# Altium PCB PCB13.PcbDoc
Units mil, origin at the board's own origin, x right, y up, seen from the top; angles counter-clockwise.
Board outline 6000 x 4000 mil, 2 copper layers (Top Layer, Bottom Layer); 12 components, 19 nets, 82 pads, 0 vias.
Unrouted connection lines stored in the file: 1.
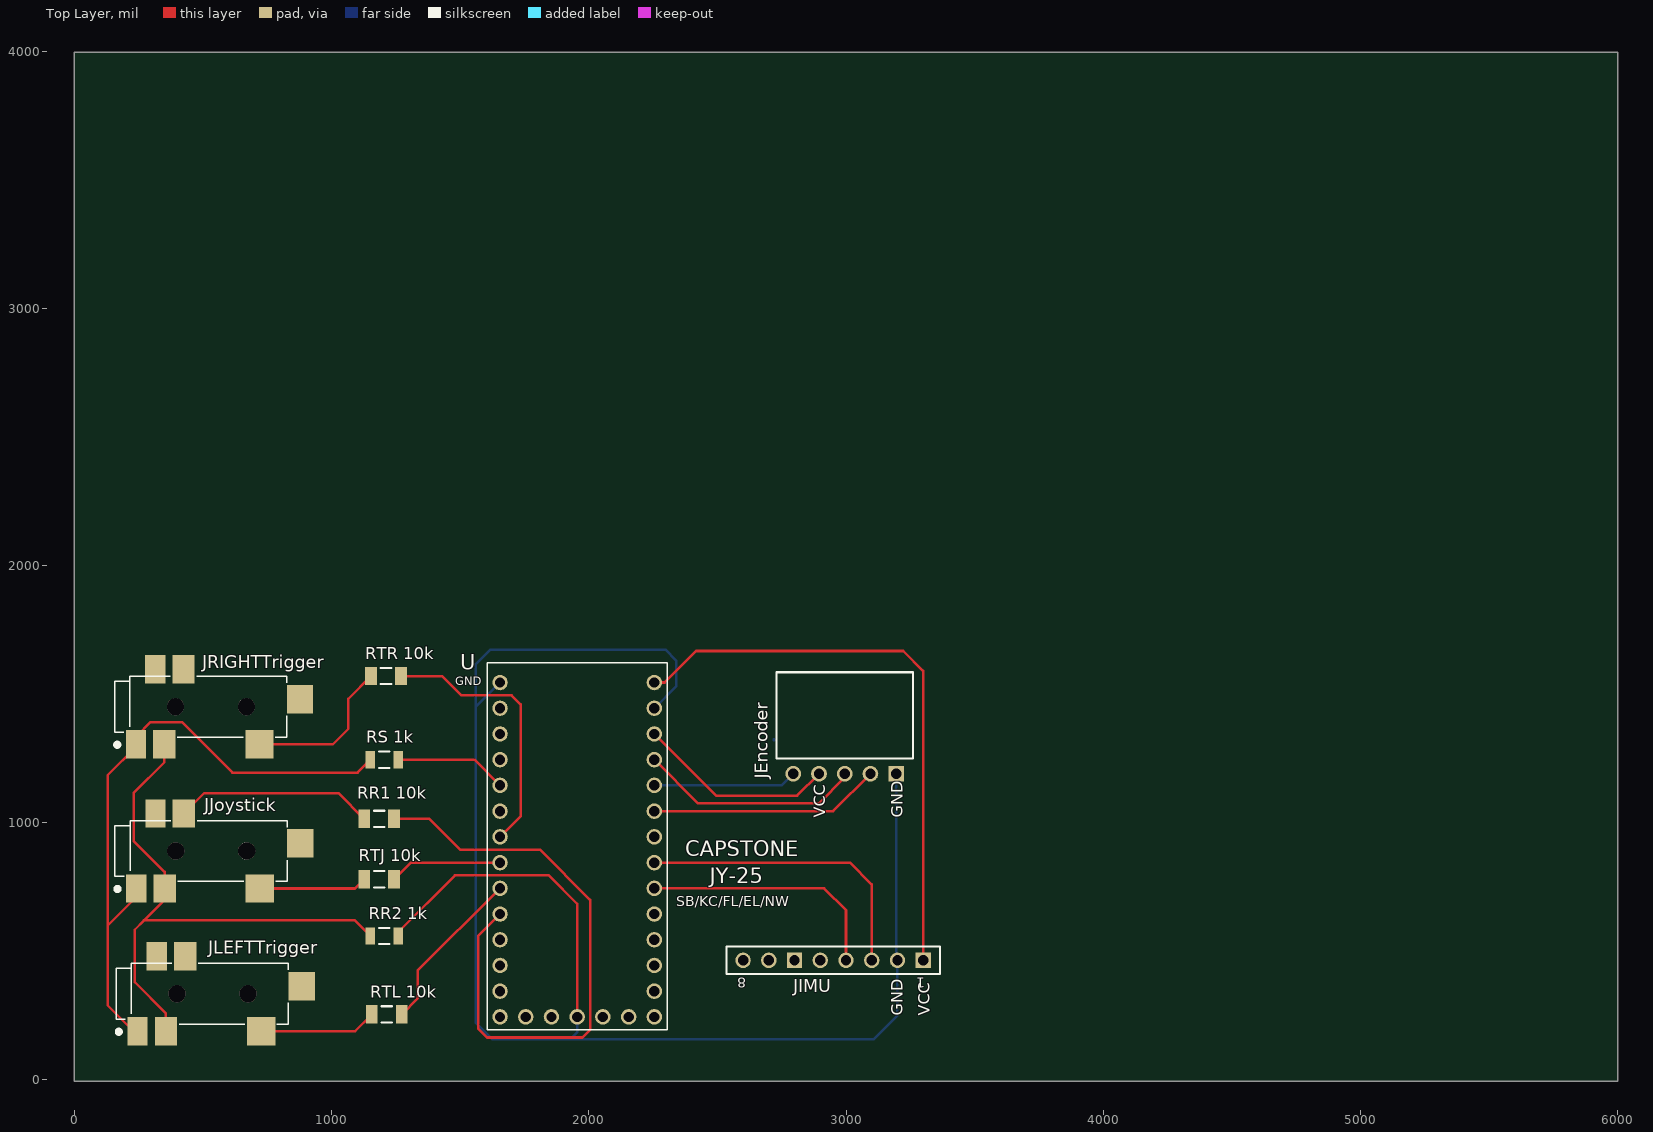
[diagram p0: Top Layer view]
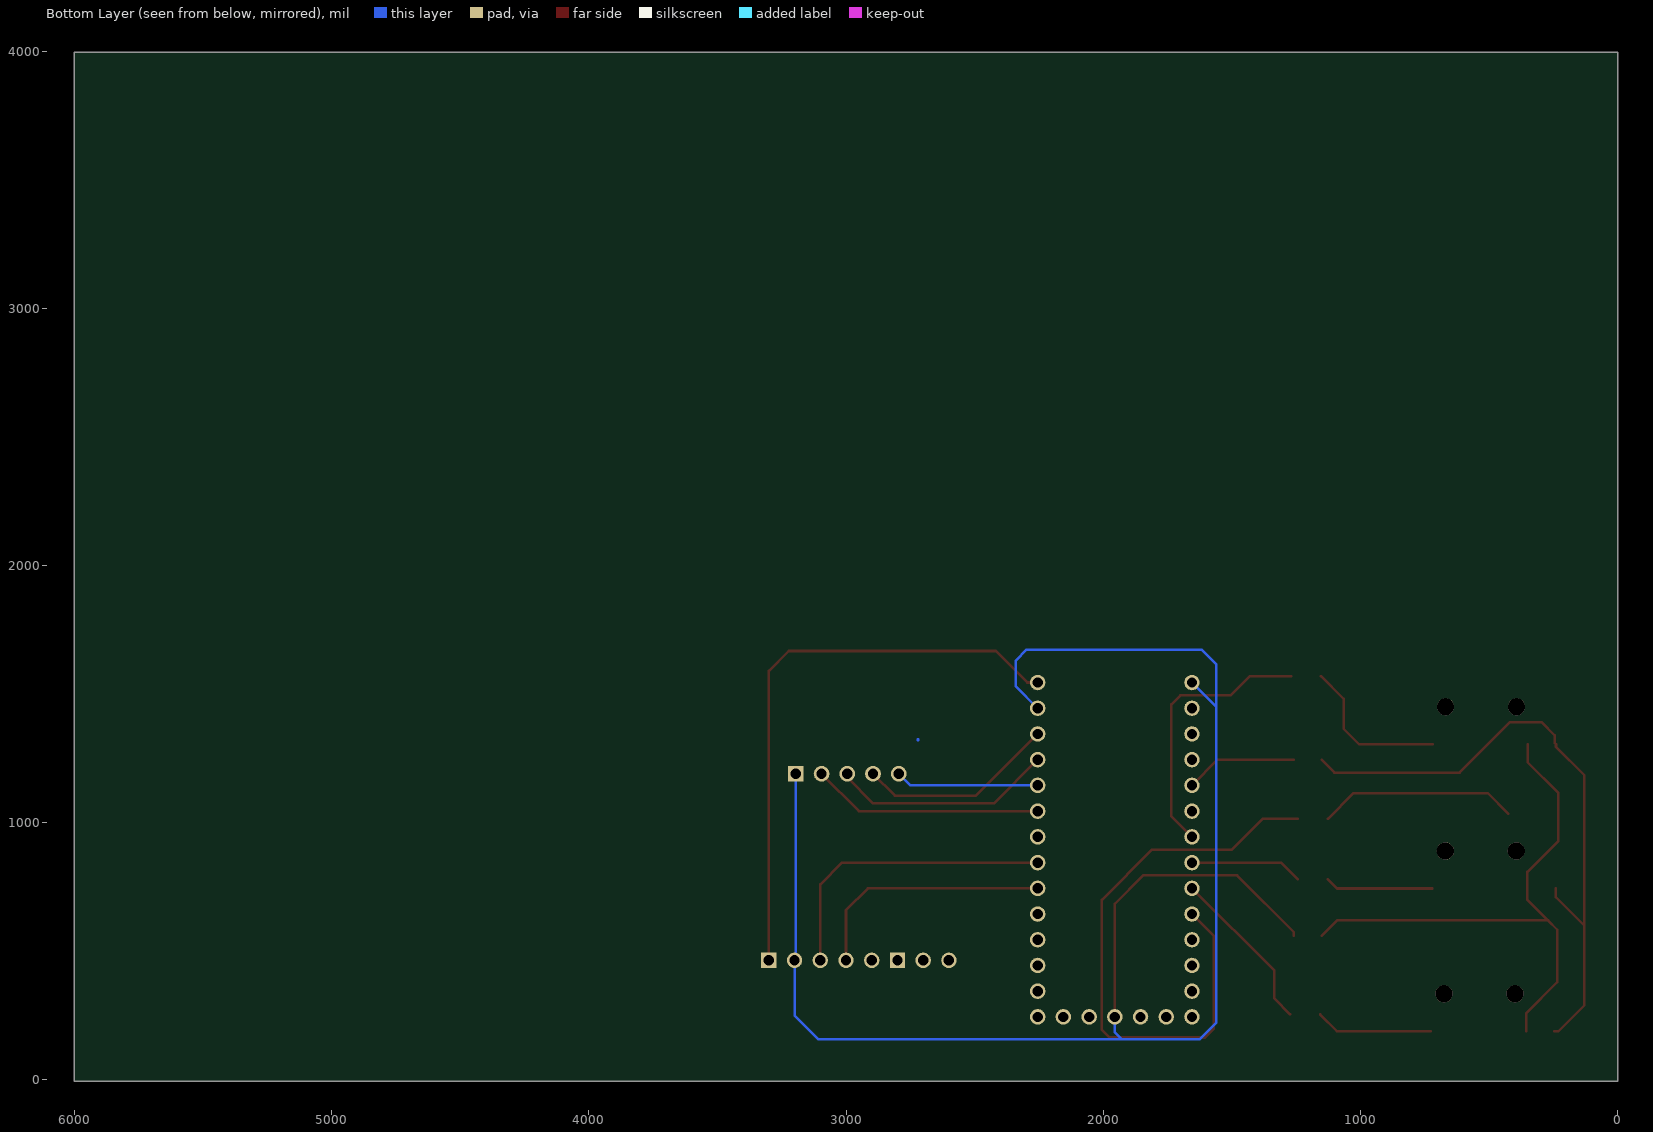
[diagram p1: Bottom Layer view, seen from below]
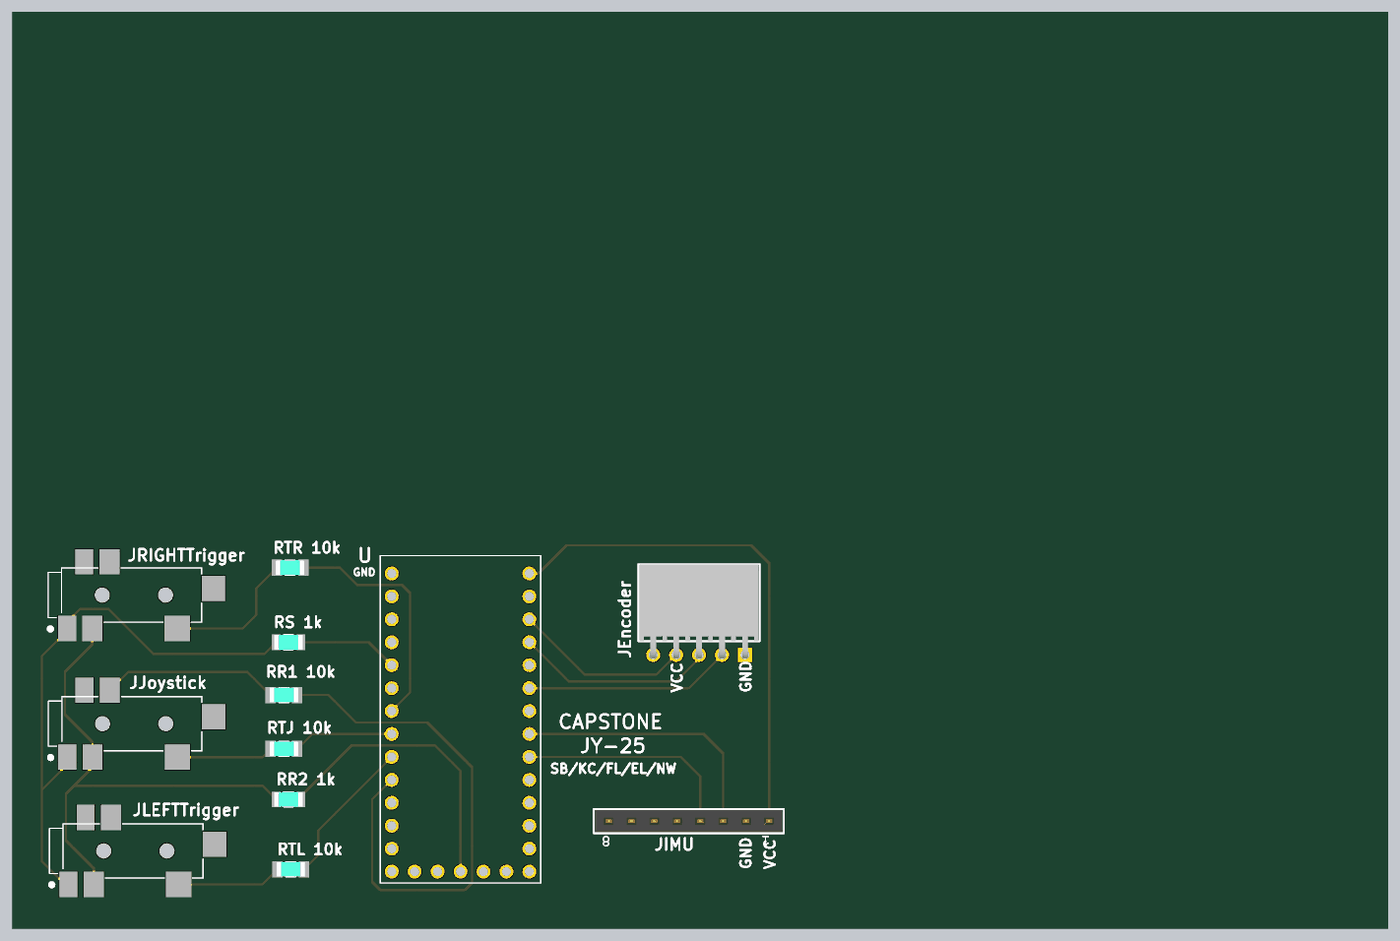
[diagram p2: 3D render of the assembled board from above, using the file's embedded part models]

## Layer stack, top to bottom
Top Solder: solder mask 0.4, Solder Resist, Dk 3.5
Top Layer: signal copper 1.4
Dielectric 1: dielectric 12.6, FR-4, Dk 4.8
Bottom Layer: signal copper 1.4
Bottom Solder: solder mask 0.4, Solder Resist, Dk 3.5

## Board outline
0,-5 6000,-5 6000,3995 0,3995

## Design rules (kind name [scope] priority, off if disabled: settings)
Clearance [All] p1: gap=10 ignorepadtopadclearanceinfootprint=FALSE except(0: Arc-Hole Track-Hole SMDPad-Hole THPad-Hole Via-Hole Fill-Hole Poly-Hole Region-Hole Text-Hole)
PolygonConnect [All] p1: connectstyle=Relief reliefconductorwidth=10 reliefentries=4 polygonreliefangle="90 Angle" airgapwidth=10
RoomDefinition Sheet1 [InComponentClass('Sheet1')] p1: confinementstyle=ConfineIn formatcopy=TRUE lockcomponents=FALSE outline 6045,60 6450,60 6450,360 6045,360
RoutingVias [All] p1: holewidth=28 width=50 viastyle="Through Hole" minholewidth=28 minwidth=50 maxholewidth=28 maxwidth=50
SolderMaskExpansion [All] p1: expansion=4
Width [All] p1: maxlimit=10 minlimit=10 preferedwidth=10
30 further rules are at their usual default settings.

## Components (designator, comment, footprint, x,y, rotation, side; value= is the part's Value field where it differs from the comment)
JEncoder "SSQ-105-02-T-S-RA" SMTC-SSQ-105-02-X-S-RA 3195,1190 r180 top
JIMU "61300811821" 61300811821 2950,465 r180 top
JJoystick "SJ-43516-SMT-BE" CUI_SJ-43516-SMT-BE 522.36,890 r0 top
JLEFTTrigger "SJ-43516-SMT-BE" CUI_SJ-43516-SMT-BE 527.36,335 r0 top
JRIGHTTrigger "SJ-43516-SMT-BE" CUI_SJ-43516-SMT-BE 521.26,1450.67 r0 top
"RR1 10k" "RN732BTTD1002D10" FP-RN732B-IPC_B 1185,1015 r0 top
"RR2 1k" "RN732BTTDK1001B25" FP-RN732B-IPC_C 1205,560 r0 top
"RS 1k" "RN732BTTDK1001B25" FP-RN732B-IPC_C 1205,1245 r0 top
"RTJ 10k" "RN732BTTD1002D10" FP-RN732B-IPC_B 1185,780 r0 top
"RTL 10k" "RN732BTTD1002D10" FP-RN732B-IPC_B 1215,255 r0 top
"RTR 10k" "RN732BTTD1002D10" FP-RN732B-IPC_B 1211.91,1570 r0 top
U "DEV-15583" MODULE_DEV-15583 1955,895 r0 top

## Footprints (in the part's own frame and the unit in brackets; to place one, negate y for a bottom-side part, rotate by r counter-clockwise, add the part's x,y. Pads: shape width x height; smd on the part's side, far side on the other; paste and mask are expansions set on the pad)
61300811821 [mm] "Socket Header, Pitch 2.54 mm, THT, Vertical, single row, 8p"
  rect 1.52x1.52 hole 1.02: 1(-8.89,0) 6(3.81,0)
  round 1.52 hole 1.02: 2(-6.35,0) 3(-3.81,0) 4(-1.27,0) 5(1.27,0) 7(6.35,0) 8(8.89,0)
  silkscreen extent -10.54,-1.35 10.54,1.35, body extent -10.41,-1.25 10.41,1.25, height 8.55
CUI_SJ-43516-SMT-BE [mm]
  rect 2x2.8 smd: 1(-7.15,-3.7) 6(-5.25,3.7)
  rect 2.8x2.8 smd: 2(5.05,-3.7)
  rect 2.2x2.8 smd: 3(-2.45,3.7) 4(-4.35,-3.7)
  rect 2.6x2.8 smd: 5(9.05,0.75)
  round 1.7 hole 1.7 unplated: ""(-3.25,0) ""(3.75,0)
  silkscreen extent -9.25,-3.95 7.75,3
FP-RN732B-IPC_B [mil]
  rect 45.48x71.11 smd paste+0 mask+0: 1(-58.09,0) 2(58.09,0)
  silkscreen extent -21,-31 21,31, body extent -91,-45 91,45, height 10
FP-RN732B-IPC_C [mil]
  rect 37.61x67.17 smd paste+0 mask+0: 1(-54.15,0) 2(54.15,0)
  silkscreen extent -21,-31 21,31, body extent -77,-39 77,39, height 10
MODULE_DEV-15583 [mm]
  round 1.53 hole 1.02: 0(-7.62,13.97) 1(-7.62,11.43) 2(-7.62,8.89) 3(-7.62,6.35) 3.3V_1(-2.54,-16.51) 3.3V_2(7.62,11.43) 4(-7.62,3.81) 5(-7.62,1.27) 6(-7.62,-1.27) 7(-7.62,-3.81) 8(-7.62,-6.35) 9(-7.62,-8.89) 10(-7.62,-11.43) 11(-7.62,-13.97) 12(-7.62,-16.51) 13(7.62,-16.51) 14(7.62,-13.97) 15(7.62,-11.43) 16(7.62,-8.89) 17(7.62,-6.35) 18(7.62,-3.81) 19(7.62,-1.27) 20(7.62,1.27) 21(7.62,3.81) 22(7.62,6.35) 23(7.62,8.89) G1(-7.62,16.51) G2(0,-16.51) G3(7.62,13.97) ON-OFF(5.08,-16.51) PGM(2.54,-16.51) VBAT(-5.08,-16.51) VIN(7.62,16.51)
  silkscreen extent -8.89,-17.78 8.89,18.48
SMTC-SSQ-105-02-X-S-RA [mm] "SQ Post Socket, 1x5 Pins, Right Angle, 2.54mm Pitch, Female"
  rect 1.55x1.55 hole 1.02: 1(0,0)
  round 1.55 hole 1.02: 2(2.54,0) 3(5.08,0) 4(7.62,0) 5(10.16,0)
  silkscreen extent -1.65,-10.03 11.81,-1.52, body extent -1.52,-10.03 11.68,0.32, height 2.41

## Part data
JEncoder: library part CMP-1023-00281-1, "SQ Post Socket, Through-hole, Right Angle, -55 to 105 degC, 2.54 mm Pitch, 5-Pin, Female, RoHS", Manufacturer=Samtec, Temperature Range="-55 to 105 degC", ComponentLink1Description="Manufacturer URL", ComponentLink1URL=http://www.samtec.com, ComponentLink2Description=Datasheet, ComponentLink2URL=http://www.samtec.com/documents/webfiles/pdf/SSQ_TH.PDF, ComponentLink3Description="Package Specification", ComponentLink3URL=http://www.samtec.com/documents/webfiles/cpdf/SSQ-1XX-XX-XXX-X-XX-XXX-XX-X-MKT.pdf, DatasheetVersion=F-214, Mounting Technology=Through-hole, Orientation="Right Angle", PackageDescription="Assembly, Socket Strip .025[0.64] SQ Tail", PackageReference=SSQ-105-02-X-S-RA, PackageVersion="BD, 6/1987", PartNumber=SSQ-105-02-T-S-RA, Pitch="2.54 mm", RoHS=True
JIMU: library part CMP-1502-01327-1, "THT Vertical Socket Header WR-PHD, Pitch 2.54 mm, Single Row, 8 pins", Contact Resistance=20mOhm, Manufacturer="Wurth Elektronik", Operating Temperature=-40to125degC, Rated Current=3A, Withstanding Voltage=500VAC, Working Voltage=250VAC, Datasheet URL=https://katalog.we-online.de/em/datasheet/6130xx11821.pdf, Gender=Female, Manufacturer URL=http://www.we-online.de, Mounting Technology=THT, Orientation=Vertical, Package Reference=61300811821, Packaging=Tray, Part Number=61300811821, Pin Number=8, Pitch=2.54mm, Publisher=WurthElektronik, Row Number=Single
JJoystick JLEFTTrigger JRIGHTTrigger: "3.5 mm, 4 Conductors, Right Angle, Surface Mount _SMT_, Audio Jack Connector", Package=None, Availability=Unavailable, MF="CUI Devices", MP=SJ-43516-SMT-TR-BE, Price=None, SnapEDA_Link=https://www.snapeda.com/parts/SJ-43516-SMT-TR-BE/CUI%20Devices/view-part/490913/?ref=snap
"RR1 10k" "RTJ 10k" "RTL 10k" "RTR 10k": library part CMP-04015-044241-1, "10kΩ ±0.5% 0.125W, 1/8W Chip Resistor 1206 (3216 Metric) Moisture Resistant Thin Film", Case/Package=1206, Case Code (Metric)=3216, Max Operating Temperature=125°C, Min Operating Temperature=-55°C, Package Quantity=5000, Power Rating=125mW, Resistance=10kR, Temperature Coefficient=10ppm/°C, Tolerance=0.5%, Voltage Rating=150V, Case Code (Imperial)=1206, Composition="Thin Film", Height=0.6mm, Length=3.2mm, Packaging="Tape and Reel", Termination=SMD/SMT, Width=1.6mm
"RR2 1k" "RS 1k": library part CMP-04015-036806-1, "1kΩ ±0.1% 0.125W, 1/8W Chip Resistor 1206 (3216 Metric) Moisture Resistant Thin Film", Case/Package=1206, Case Code (Metric)=3216, Max Operating Temperature=125°C, Min Operating Temperature=-55°C, Power Rating=125mW, Resistance=1kR, Temperature Coefficient=25ppm/°C, Tolerance=0.1%, Voltage Rating=150V, Case Code (Imperial)=1206, Composition="Thin Film", Height=0.6mm, Length=3.2mm, Packaging="Tape and Reel", Termination=SMD/SMT, Voltage Rating (DC)=150V, Weight=0.000571oz, Width=1.6mm
U: "RT1062 Teensy 4.0 i.MX ARM?? Cortex??-M7 MPU Embedded Evaluation Board", Package=None, Digi-Key_Part_Number=1568-DEV-15583-ND, Digi-Key_Purchase_URL=https://www.digikey.com/product-detail/en/sparkfun-electronics/DEV-15583/1568-DEV-15583-ND/10384551?utm_source=snapeda&utm_medium=aggregator&utm_campaign=symbol, MF="SparkFun Electronics", MP=DEV-15583, SnapEDA_Link=https://www.snapeda.com/parts/DEV-15583/SparkFun%20Electronics/view-part/4001229/?ref=snap

## Nets (pads, with @x,y where several pads share a name; then routed paths per layer and width w, separated by ;. In a path a pad name is that pad's centre, name@x,y a point inside that pad or via, vN(x,y) a via of type N, cw(c..) or ccw(c..) an arc to the next point about the centre after c; other vN are vias at no path point)
GND: "RR2 1k.2" JEncoder.1 JIMU.2 U.G1 U.G2 U.G3 | length 6601.7
  Top Layer w10: 1259.15,560 1259.15,574.15 1480,795 1845,795 1955,685 U.G2
  Bottom Layer w10: U.G1 1560,1450 ; U.G2 1955,185 1927.5,157.5 ; U.G3 2340,1530 2340,1630 2297.5,1672.5 1617.5,1672.5 1560,1615 1560,1450 ; JEncoder.1 3195,470 JIMU.2 3200,250 3107.5,157.5 1927.5,157.5 ; 1560,1450 1560,222.5 1625,157.5 1927.5,157.5
NetJEncoder_2: JEncoder.2 U.21 | length 900.1
  Top Layer w10: U.21 2950,1045 JEncoder.2
NetJEncoder_3: JEncoder.3 U.23 | length 866.8
  Top Layer w10: U.23 2425,1075 2895,1075 2995,1175 JEncoder.3
NetJEncoder_4: JEncoder.4 U.3.3V_2 | length 774.6
  Top Layer w10: U.3.3V_2 2495,1105 2810,1105 JEncoder.4
NetJEncoder_5: JEncoder.5 U.22 | length 563.6
  Bottom Layer w10: U.22 2750,1145 JEncoder.5 ; 2720,1320 2720,1325
NetJIMU_1: JIMU.1 U.VIN | length 2252.8
  Top Layer w10: U.VIN 2295,1545 2417.5,1667.5 3222.5,1667.5 3300,1590 JIMU.1
NetJIMU_3: JIMU.3 U.19 | length 1175.2
  Top Layer w10: U.19 3015,845 3100,760 JIMU.3
NetJIMU_4: JIMU.4 U.18 | length 975.2
  Top Layer w10: U.18 2915,745 3000,660 JIMU.4
NetJJoystick_1: "RS 1k.1" JJoystick.1 JLEFTTrigger.1 JRIGHTTrigger.1 | length 2473.5
  Top Layer w10: JJoystick.1 240.87,710.87 130,600 ; JLEFTTrigger.1 230.67,189.33 130,290 130,600 ; 1150.85,1245 1100.85,1195 615,1195 420,1390 295,1390 245,1340 245,1310.24 JRIGHTTrigger.1 239.76,1294.76 130,1185 130,600
NetJJoystick_2: "RTJ 10k.1" JJoystick.2 | length 420.5
  Top Layer w10: JJoystick.2 1091.24,744.33 1126.91,780
NetJJoystick_3: "RR1 10k.1" JJoystick.3 | length 775.3
  Top Layer w10: JJoystick.3 505.24,1115 1026.91,1115 1126.91,1015
NetJJoystick_4: "RR2 1k.1" JJoystick.4 JLEFTTrigger.4 JRIGHTTrigger.4 | length 2217.8
  Top Layer w10: JRIGHTTrigger.4 350,1235 230.67,1115.67 230.67,929.33 351.1,808.9 JJoystick.4 351.1,700 271.1,620 ; JLEFTTrigger.4 356.1,258.9 235,380 235,583.9 271.1,620 ; 1150.85,560 1090.85,620 271.1,620
NetJLeftTrigger_2: "RTL 10k.1" JLEFTTrigger.2 | length 457.9
  Top Layer w10: JLEFTTrigger.2 1091.24,189.33 1156.91,255
NetJRightTrigger_2: "RTR 10k.1" JRIGHTTrigger.2 | length 611.6
  Top Layer w10: JRIGHTTrigger.2 1005,1305 1065,1365 1065,1481.18 1153.82,1570
"NetRR1 10k_2": "RR1 10k.2" U.8 | length 2339.5
  Top Layer w10: 1243.09,1015 1380,1015 1500,895 1810,895 2005,700 2005,195 1975,165 1605,165 1570,200 1570,560 U.8
"NetRS 1k_2": "RS 1k.2" U.3 | length 437.3
  Top Layer w10: 1259.15,1245 1555,1245 U.3
"NetRTJ 10k_2": "RTJ 10k.2" U.6 | length 438.8
  Top Layer w10: 1243.09,780 1308.09,845 U.6
"NetRTL 10k_2": "RTL 10k.2" U.7 | length 655.3
  Top Layer w10: 1273.09,255 1335,316.91 1335,425 U.7 U.7@1650,750
"NetRTR 10k_2": "RTR 10k.2" U.5 | length 1058.7
  Top Layer w10: 1270,1570 1430,1570 1505,1495 1700,1495 1735,1460 1735,1025 U.5
pads on no net: JIMU.5 JIMU.6 JIMU.7 JIMU.8 JJoystick. JJoystick.5 JJoystick.6 JLEFTTrigger. JLEFTTrigger.3 JLEFTTrigger.5 JLEFTTrigger.6 JRIGHTTrigger. JRIGHTTrigger.3 JRIGHTTrigger.5 JRIGHTTrigger.6 U.0 U.1 U.2 U.3.3V_1 U.4 U.9 U.10 U.11 U.12 U.13 U.14 U.15 U.16 U.17 U.20 U.ON-OFF U.PGM U.VBAT

## Silkscreen, mask and mechanical layers (free items; w line width, h text height)
Top Overlay:
  text "VCC" at 2920,1020 h45 r90
  text "GND" at 3220,1020 h45 r90
  text "CAPSTONE" at 2375,870 h60
  text "JY-25" at 2470,765 h60
  text "SB/KC/FL/EL/NW" at 2340,675 h40
  text "GND" at 3220,250 h45 r90
  text "VCC" at 3325,250 h45 r90

## Text inside footprints (layer, text, board x,y; h text height)
JIMU: Top Overlay "8" at 2612.2,398.07 h40 r180; Top Overlay "1" at 3307.48,398.07 h40 r180
U: Top Overlay "GND" at 1480,1535 h32; Mechanical 13 "GND" at 1480,1535 h32